# Altium PCB Copy of PCB1.PcbDoc (part 1 of 3)
Units mil, origin at the board's own origin, x right, y up, seen from the top; angles counter-clockwise.
Board outline 2060 x 2060 mil, 4 copper layers (L1, L2, L3, L4), stack 61.583 mil thick; 50 components, 94 nets, 313 pads, 31 vias.
Unrouted connection lines stored in the file: 190.
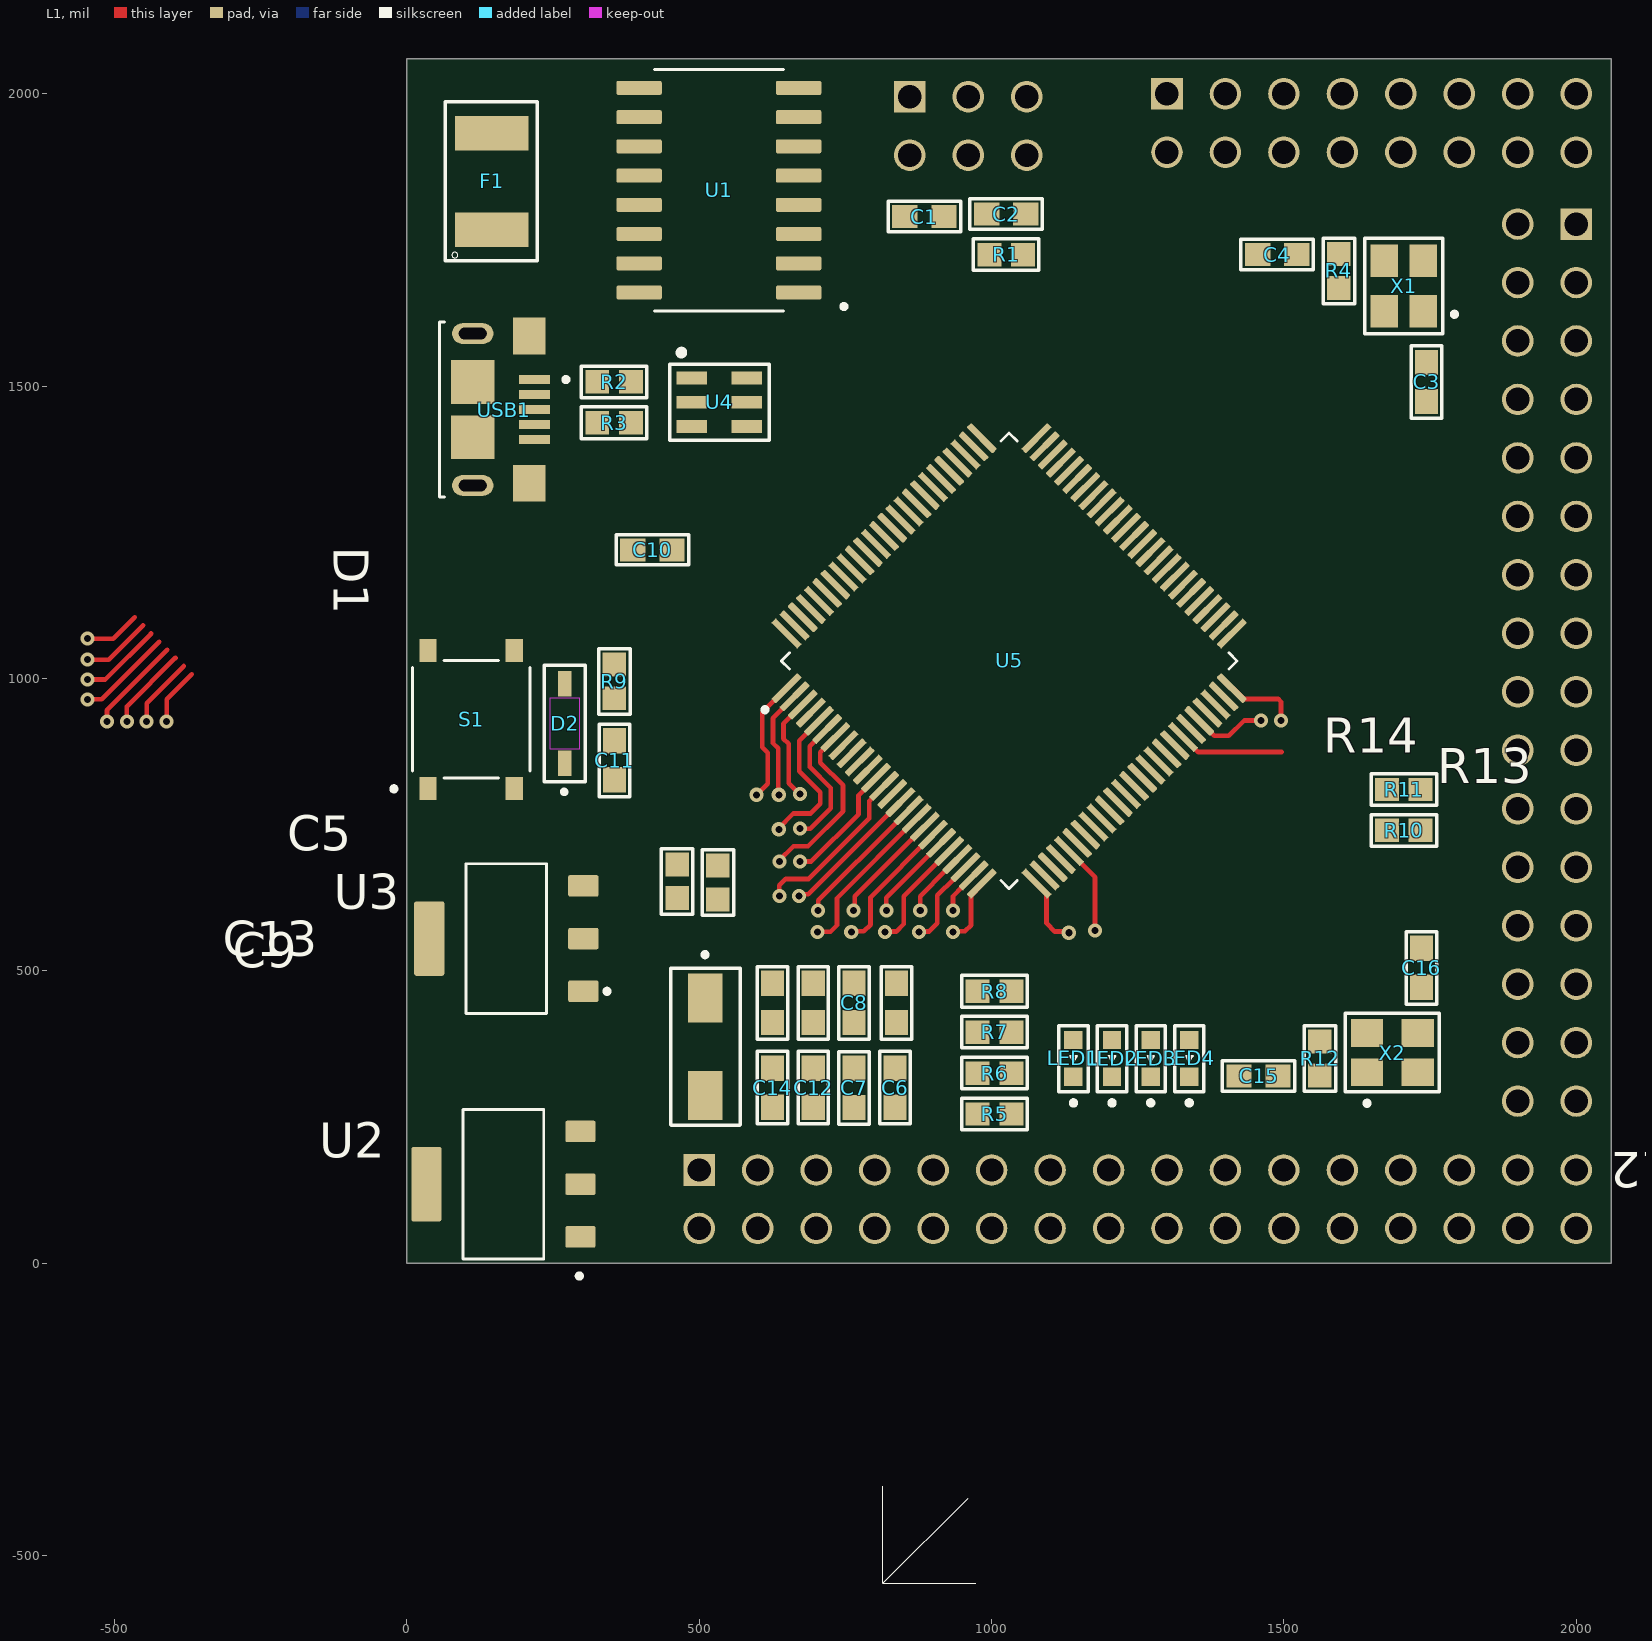
[diagram p0: L1 view]
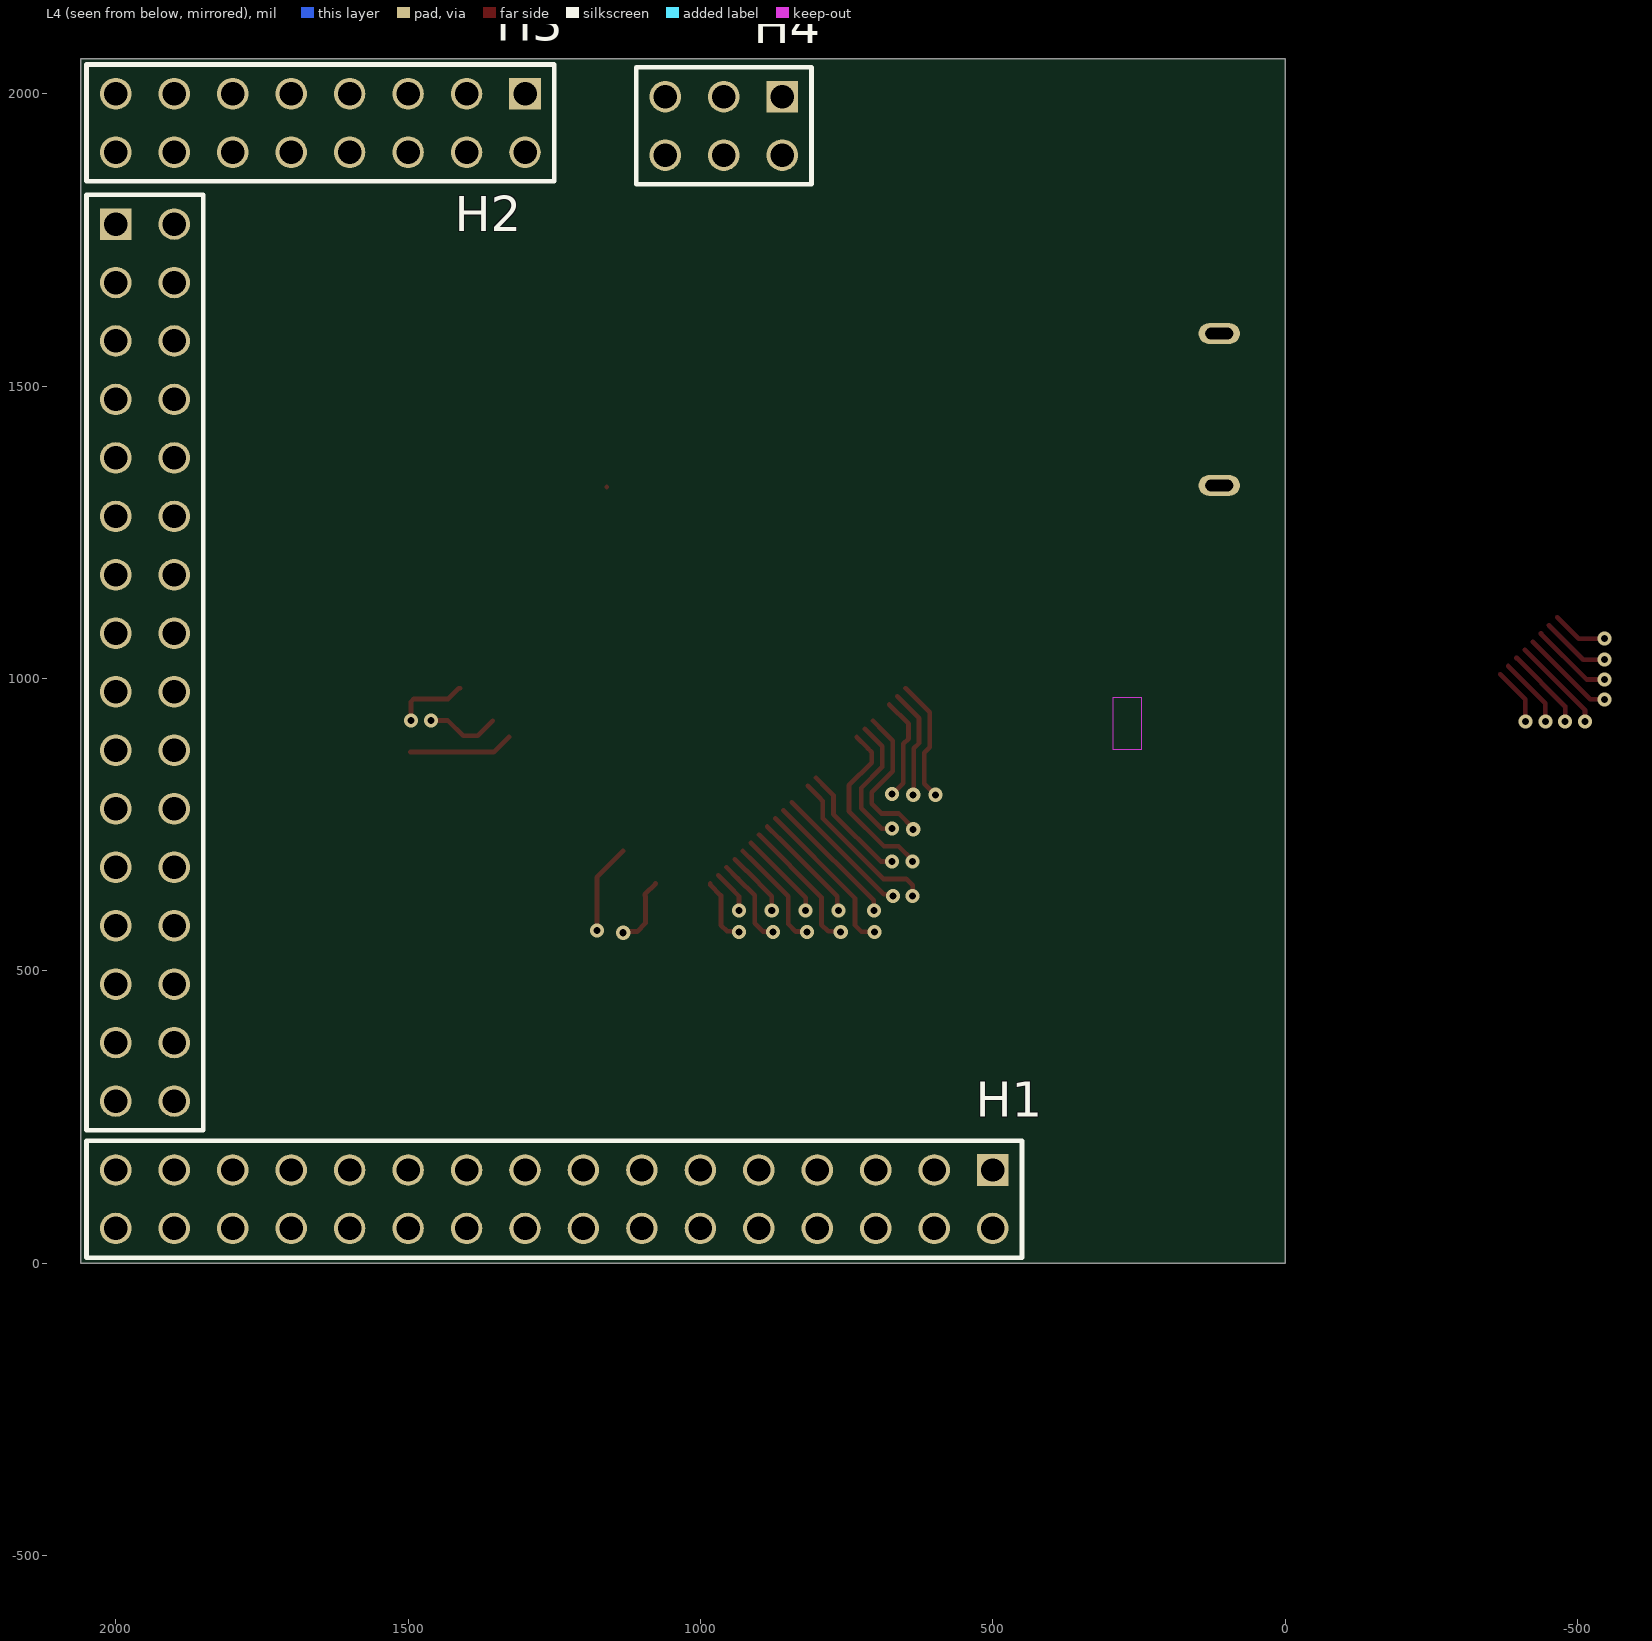
[diagram p1: L4 view, seen from below]
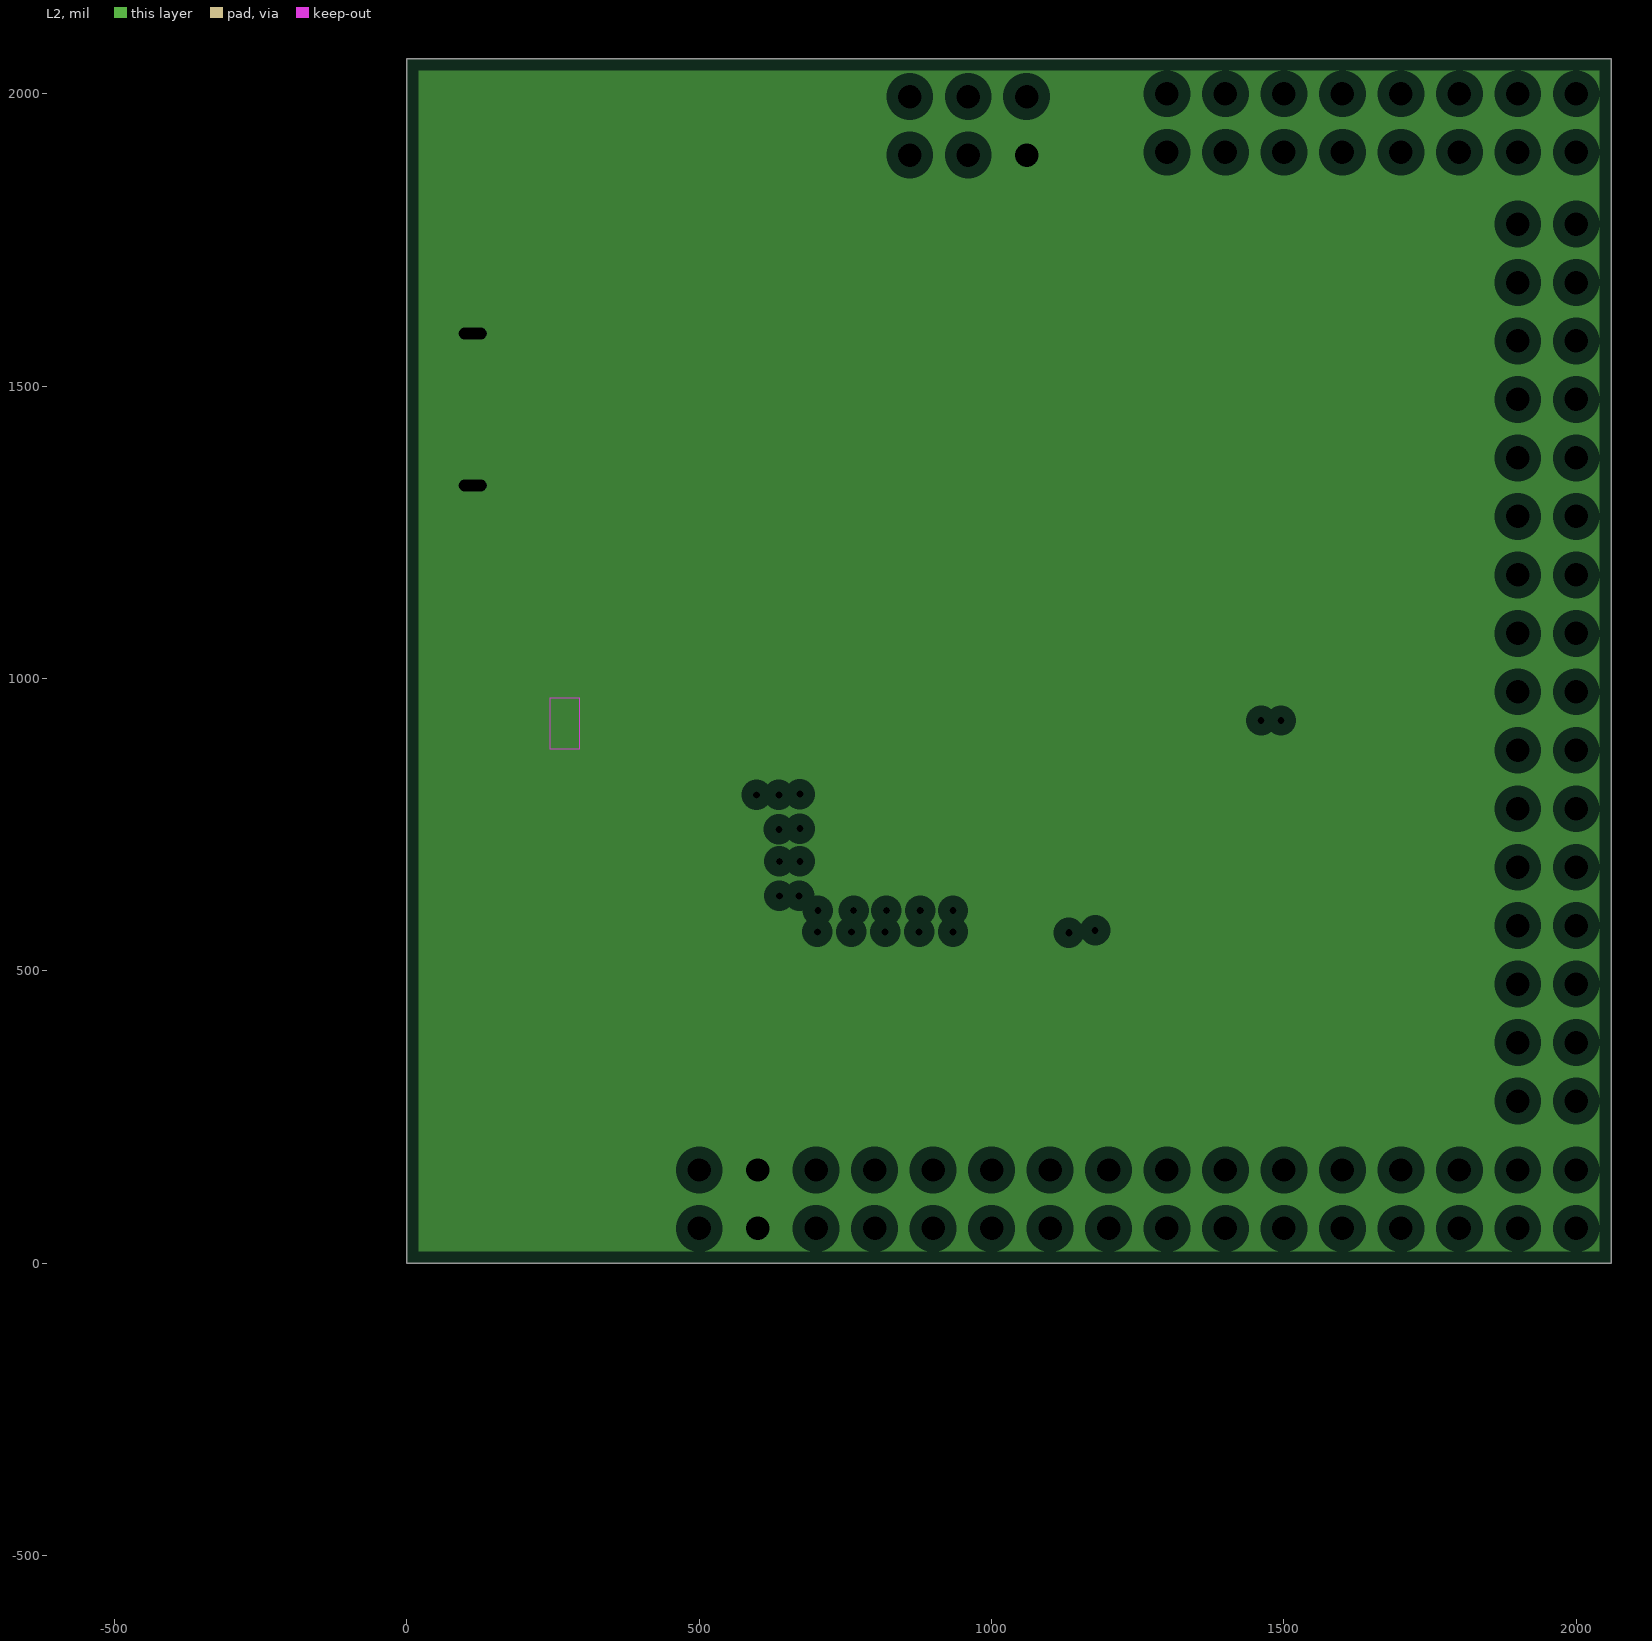
[diagram p2: L2, clearances drawn from the general rule]

## Layer stack, top to bottom
Top Solder: solder mask 0.4, Solder Resist, Dk 3.5
L1: signal copper 1.378
Dielectric 2: prepreg 3.9134, PP-006, Dk 4.1
L2: plane copper 0.5984, net GND
Dielectric 1: dielectric 49.8031, FR-4, Dk 4.8
L3: signal copper 0.5984
Dielectric 3: prepreg 3.9134, PP-006, Dk 4.1
L4: signal copper 1.378
Bottom Solder: solder mask 0.4, Solder Resist, Dk 3.5

## Board outline
0,0 2060,0 2060,2060 0,2060

## Design rules (kind name [scope] priority, off if disabled: settings)
Clearance Smaller [WithinRoom('AtmegaRoom')] p1: gap=6 ignorepadtopadclearanceinfootprint=FALSE
Clearance [All] p2: gap=10 ignorepadtopadclearanceinfootprint=FALSE except(6: SMDPad-SMDPad)
DiffPairsRouting [All] p1: maxlimit=10 minlimit=10 mostfreqgap=10 toplayer_minwidth=15 toplayer_maxwidth=15 toplayer_prefwidth=15 midlayer1_minwidth=15 midlayer1_maxwidth=15 midlayer1_prefwidth=15 bottomlayer_minwidth=15 bottomlayer_maxwidth=15 bottomlayer_prefwidth=15 maxuncoupledlength=500
PlaneClearance [All] p1: clearance=20
PlaneConnect [All] p1: planeconnectstyle=Direct reliefexpansion=20 reliefentries=4 reliefconductorwidth=10 reliefairgap=10
PolygonConnect [All] p1: connectstyle=Relief reliefconductorwidth=10 reliefentries=4 polygonreliefangle="90 Angle" airgapwidth=10
RoutingVias [All] p1: holewidth=12 width=24 viastyle="Through Hole" minholewidth=12 minwidth=24 maxholewidth=12 maxwidth=24
SolderMaskExpansion [All] p1: expansion=2 istentingtop=FALSE
SupplyNets "Schematic Supply Nets_3" [InNet('3.3V')] p1: voltage=0.000
SupplyNets "Schematic Supply Nets_2" [InNet('VIN')] p2: voltage=0.000
SupplyNets "Schematic Supply Nets_1" [InNet('GND')] p3: voltage=0.000
SupplyNets "Schematic Supply Nets" [InNet('+5V')] p4: voltage=0.000
Width [All] p1: maxlimit=100 minlimit=8 preferedwidth=10 midlayer1_maxwidth=10 minimp=50.000000 maximp=50.000000 favimp=50.000000
27 further rules are at their usual default settings.

## Classes and differential pairs
differential pair class Diff90: USB
differential pair USB: +USB_P -USB_N

## Components (designator, comment, footprint, x,y, rotation, side; value= is the part's Value field where it differs from the comment)
C1 "100nF" "CAPC1608X90 - 100NF" 885,1790 r180 top
C2 "100nF" "CAPC1608X90 - 100NF" 1025,1794.01 r0 top
C3 "22pF" "CAPC1608X90 - 22PF" 1744,1507 r90 top
C4 "22pF" "CAPC1608X90 - 22PF" 1488.54,1725 r0 top
C5 "10uF" "CAPC1608X90 - 10UF" 625,445 r90 top value=10µF
C6 "10uF" "CAPC1608X90 - 10UF" 835,300 r270 top value=10µF
C7 "100nF" "CAPC1608X90 - 100NF" 764.88,299.71 r270 top
C8 "10uF" "CAPC1608X90 - 10UF" 765,445 r90 top value=10µF
C9 "100nF" "CAPC1608X90 - 100NF" 695,445 r90 top
C10 "100nF" "CAPC1608X90 - 100NF" 420,1220 r180 top
C11 "100nF" "CAPC1608X90 - 100NF" 355,860 r90 top
C12 "100nF" "CAPC1608X90 - 100NF" 695,300 r270 top
C13 "100nF" "CAPC1608X90 - 100NF" 837.04,445 r90 top
C14 "100nF" "CAPC1608X90 - 100NF" 625,300 r270 top
C15 "22pF" "CAPC1608X90 - 22PF" 1456.54,320 r0 top
C16 "22pF" "CAPC1608X90 - 22PF" 1735,505 r270 top
D1 "SS14" DIOM4325X250N 510,370 r270 top
D2 "1N4148W" SOD123_DIO 270,922.91 r90 top
F1 "500mA PTC" FUSM4632X85 145,1850 r90 top value=150mΩ
H1 "Header Through Hole 32 position" SAMTEC_TSW-116-07-G-D 1250,109.23 r0 bottom
H2 "Header Through Hole 32 position" SAMTEC_TSW-116-07-G-D 1950,1027.12 r270 bottom
H3 "Header Through Hole 16 position" SAMTEC_TSW-108-07-G-D 1650,1950 r0 bottom
H4 "Header Through Hole 6 position" SAMTEC_TSW-103-07-G-D 960,1945 r0 bottom
LED1 "Green Led" WL-SMCW_0603-G 1140,350 r90 top
LED2 "Yellow Led" WL-SMCW_0603-Y 1206.01,350 r90 top
LED3 "Red Led" WL-SMCW_0603-R 1272.02,350 r90 top
LED4 "Blue Led" WL-SMCW_0603-B 1338.03,350 r90 top
R1 "10k" "RESC1607X60N - 10K" 1025,1725 r0 top value=10kΩ
R2 "22" "RESC1607X60N - 22" 354.48,1507.3 r0 top value=22Ω
R3 "22" "RESC1607X60N - 22" 354.48,1437.29 r0 top value=22Ω
R4 "1M" "RESC1607X60N - 1M" 1594,1697 r270 top value=1mF
R5 "1k" "RESC1607X60N - 1K" 1005,255 r0 top value=1kΩ
R6 "1k" "RESC1607X60N - 1K" 1005,325 r0 top value=1kΩ
R7 "1k" "RESC1607X60N - 1K" 1005,395 r0 top value=1kΩ
R8 "1k" "RESC1607X60N - 1K" 1005,465 r0 top value=1kΩ
R9 "10k" "RESC1607X60N - 10K" 355,995 r90 top value=10kΩ
R10 "10k" "RESC1607X60N - 10K" 1705,739.99 r0 top value=10kΩ
R11 "10k" "RESC1607X60N - 10K" 1705,810 r0 top value=10kΩ
R12 "1M" "RESC1607X60N - 1M" 1561.55,350 r270 top value=1mF
R13 "1k" "RESC1607X60N - 1K" 532,651 r90 top value=1kΩ
R14 "1k" "RESC1607X60N - 1K" 461.99,653 r90 top value=1kΩ
S1 "SW" SW_TS-1187A-B-A-B 110,930 r90 top
U1 "CH340G" SOP127P780X200-16N 533.58,1835 r180 top
U2 "AMS1117-5.0" SOT229P700X180-4N-5.0 165,135 r90 top
U3 "AMS1117-3.3" SOT229P700X180-4N-3.3 170,555 r90 top
U4 "SRV05-4" TSOP6_3P1X1P7_ONS 534.48,1472.29 r0 top
U5 "ATMEGA2560-16AU" QFP50P1600X1600X120-100N 1030,1030 r45 top locked
USB1 "Micro-USB-B" AMPHENOL_10118193-0001LF 112.6,1459.92 r270 top
X1 "12MHz" OSCCC250X320X70-4N 1710,1661.13 r180 top
X2 "16MHZ" XTAL_7M-16.000MAAJ-T 1685.56,359.99 r90 top

## Footprints (in the part's own frame and the unit in brackets; to place one, negate y for a bottom-side part, rotate by r counter-clockwise, add the part's x,y. Pads: shape width x height; smd on the part's side, far side on the other; paste and mask are expansions set on the pad)
AMPHENOL_10118193-0001LF [mm]
  rect 0.4x1.35 smd: 1(-1.3,2.675) 2(-0.65,2.675) 3(0,2.675) 4(0.65,2.675) 5(1.3,2.675)
  rect 1.6x1.4 smd: S1(-3.2,2.45) S2(3.2,2.45)
  rect 1.9x1.9 smd: S3(1.2,0) S4(-1.2,0)
  oval 0.9x1.8 hole 0.5 slot 1.2 at 90 deg: S5(-3.3,0) S6(3.3,0)
  silkscreen extent -3.8,-1.45 3.8,4.15, body extent -3.93,-2.76 3.93,2.95, height 2.85
"CAPC1608X90 - 10UF" [mm]
  rect 1.1x1 smd: 1(-0.85,0) 2(0.85,0)
  silkscreen extent -1.57,-0.66 1.57,0.66, body extent -0.81,-0.44 0.79,0.46, height 0.81
"CAPC1608X90 - 22PF" [mm]
  rect 1.1x1 smd: 1(-0.85,0) 2(0.85,0)
  silkscreen extent -1.57,-0.66 1.57,0.66, body extent -0.8,-0.44 0.8,0.46, height 0.81
"CAPC1608X90 - 100NF" [mm]
  rect 1.1x1 smd: 1(-0.85,0) 2(0.85,0)
  silkscreen extent -1.57,-0.66 1.57,0.66, body extent -0.8,-0.4 0.8,0.4, height 0.9
DIOM4325X250N [mm]
  rect 2.12x1.5 smd paste+0 mask+0.102: A(2.115,0) C(-2.115,0)
  silkscreen extent -4.1,-1.5 3.4,1.52, body extent -2.57,-1.25 2.57,1.31, height 2.5
FUSM4632X85 [mm]
  rect 1.5x3.2 smd: 1(-2.1,0) 2(2.1,0)
  silkscreen extent -3.45,-1.98 3.45,2.01, body extent -2.27,-1.62 2.27,1.62, height 1.11
OSCCC250X320X70-4N [mm]
  rect 1.2x1.4 smd: 1(-0.723,0.846) 2(-0.723,-1.354) 3(0.977,-1.354) 4(0.977,0.846)
  silkscreen extent -2.17,-2.34 1.83,1.83, body extent -1.12,-1.85 1.38,1.35, height 0.8
QFP50P1600X1600X120-100N [mm]
  rrect25% 1.6x0.28 smd: 1(-7.68,6) 2(-7.68,5.5) 3(-7.68,5) 4(-7.68,4.5) 5(-7.68,4) 6(-7.68,3.5) 7(-7.68,3) 8(-7.68,2.5) 9(-7.68,2) 10(-7.68,1.5) 11(-7.68,1) 12(-7.68,0.5) 13(-7.68,0) 14(-7.68,-0.5) 15(-7.68,-1) 16(-7.68,-1.5) 17(-7.68,-2) 18(-7.68,-2.5) 19(-7.68,-3) 20(-7.68,-3.5) 21(-7.68,-4) 22(-7.68,-4.5) 23(-7.68,-5) 24(-7.68,-5.5) 25(-7.68,-6) 51(7.68,-6) 52(7.68,-5.5) 53(7.68,-5) 54(7.68,-4.5) 55(7.68,-4) 56(7.68,-3.5) 57(7.68,-3) 58(7.68,-2.5) 59(7.68,-2) 60(7.68,-1.5) 61(7.68,-1) 62(7.68,-0.5) 63(7.68,0) 64(7.68,0.5) 65(7.68,1) 66(7.68,1.5) 67(7.68,2) 68(7.68,2.5) 69(7.68,3) 70(7.68,3.5) 71(7.68,4) 72(7.68,4.5) 73(7.68,5) 74(7.68,5.5) 75(7.68,6)
  rrect25% 0.28x1.6 smd: 26(-6,-7.68) 27(-5.5,-7.68) 28(-5,-7.68) 29(-4.5,-7.68) 30(-4,-7.68) 31(-3.5,-7.68) 32(-3,-7.68) 33(-2.5,-7.68) 34(-2,-7.68) 35(-1.5,-7.68) 36(-1,-7.68) 37(-0.5,-7.68) 38(0,-7.68) 39(0.5,-7.68) 40(1,-7.68) 41(1.5,-7.68) 42(2,-7.68) 43(2.5,-7.68) 44(3,-7.68) 45(3.5,-7.68) 46(4,-7.68) 47(4.5,-7.68) 48(5,-7.68) 49(5.5,-7.68) 50(6,-7.68) 76(6,7.68) 77(5.5,7.68) 78(5,7.68) 79(4.5,7.68) 80(4,7.68) 81(3.5,7.68) 82(3,7.68) 83(2.5,7.68) 84(2,7.68) 85(1.5,7.68) 86(1,7.68) 87(0.5,7.68) 88(0,7.68) 89(-0.5,7.68) 90(-1,7.68) 91(-1.5,7.68) 92(-2,7.68) 93(-2.5,7.68) 94(-3,7.68) 95(-3.5,7.68) 96(-4,7.68) 97(-4.5,7.68) 98(-5,7.68) 99(-5.5,7.68) 100(-6,7.68)
  silkscreen extent -9.1,-7 7,7, body extent -8,-8 8,8, height 1.06
"RESC1607X60N - 1K" [mm]
  rect 1.04x1.02 smd: 1(-0.735,0) 2(0.735,0)
  silkscreen extent -1.42,-0.69 1.42,0.69, body extent -0.8,-0.4 0.8,0.4, height 0.55
"RESC1607X60N - 1M" [mm]
  rect 1.04x1.02 smd: 1(-0.735,0) 2(0.735,0)
  silkscreen extent -1.42,-0.69 1.42,0.69, body extent -0.8,-0.4 0.8,0.4, height 0.55
"RESC1607X60N - 10K" [mm]
  rect 1.04x1.02 smd: 1(-0.735,0) 2(0.735,0)
  silkscreen extent -1.42,-0.69 1.42,0.69, body extent -0.8,-0.37 0.8,0.43, height 0.55
"RESC1607X60N - 22" [mm]
  rect 1.04x1.02 smd: 1(-0.735,0) 2(0.735,0)
  silkscreen extent -1.42,-0.69 1.42,0.69, body extent -0.8,-0.4 0.8,0.4, height 0.55
SAMTEC_TSW-103-07-G-D [mm]
  rect 1.37x1.37 / inner round 1.37 / far side rect 1.37x1.37 hole 1.02: 01(-2.54,-1.27)
  round 1.37 hole 1.02: 02(-2.54,1.27) 03(0,-1.27) 04(0,1.27) 05(2.54,-1.27) 06(2.54,1.27)
  silkscreen extent -3.81,-2.54 3.81,2.54, body extent -3.81,-2.54 3.81,2.54, height 8.38
SAMTEC_TSW-108-07-G-D [mm]
  rect 1.37x1.37 / inner round 1.37 / far side rect 1.37x1.37 hole 1.02: 01(-8.89,-1.27)
  round 1.37 hole 1.02: 02(-8.89,1.27) 03(-6.35,-1.27) 04(-6.35,1.27) 05(-3.81,-1.27) 06(-3.81,1.27) 07(-1.27,-1.27) 08(-1.27,1.27) 09(1.27,-1.27) 10(1.27,1.27) 11(3.81,-1.27) 12(3.81,1.27) 13(6.35,-1.27) 14(6.35,1.27) 15(8.89,-1.27) 16(8.89,1.27)
  silkscreen extent -10.16,-2.54 10.16,2.54, body extent -10.24,-2.59 10.08,2.49, height 8.38
SAMTEC_TSW-116-07-G-D [mm]
  rect 1.37x1.37 hole 1.02: 01(-19.05,-1.27)
  round 1.37 hole 1.02: 02(-19.05,1.27) 03(-16.51,-1.27) 04(-16.51,1.27) 05(-13.97,-1.27) 06(-13.97,1.27) 07(-11.43,-1.27) 08(-11.43,1.27) 09(-8.89,-1.27) 10(-8.89,1.27) 11(-6.35,-1.27) 12(-6.35,1.27) 13(-3.81,-1.27) 14(-3.81,1.27) 15(-1.27,-1.27) 16(-1.27,1.27) 17(1.27,-1.27) 18(1.27,1.27) 19(3.81,-1.27) 20(3.81,1.27) 21(6.35,-1.27) 22(6.35,1.27) 23(8.89,-1.27) 24(8.89,1.27) 25(11.43,-1.27) 26(11.43,1.27) 27(13.97,-1.27) 28(13.97,1.27) 29(16.51,-1.27) 30(16.51,1.27) 31(19.05,-1.27) 32(19.05,1.27)
  silkscreen extent -20.32,-2.54 20.32,2.54, body extent -20.32,-2.46 20.32,2.62, height 8.38
SOD123_DIO [mm]
  rect 1.111x0.601 smd paste+0 mask+0: 1(-1.725,0) 2(1.725,0)
  Keep-Out Layer region: -1.119,-0.624 -1.119,0.624 1.119,0.624 1.119,-0.624
  silkscreen extent -3.03,-0.89 2.54,0.89, body extent -1.93,-0.66 1.92,0.69, height 0.81
SOP127P780X200-16N [mm]
  rrect25% 1.97x0.61 smd paste+0 mask+0.102: 1(-3.465,4.445) 2(-3.465,3.175) 3(-3.465,1.905) 4(-3.465,0.635) 5(-3.465,-0.635) 6(-3.465,-1.905) 7(-3.465,-3.175) 8(-3.465,-4.445) 9(3.465,-4.445) 10(3.465,-3.175) 11(3.465,-1.905) 12(3.465,-0.635) 13(3.465,0.635) 14(3.465,1.905) 15(3.465,3.175) 16(3.465,4.445)
  silkscreen extent -5.54,-5.25 2.8,5.25, body extent -3.96,-5.1 3.96,5.1, height 1.8
SOT229P700X180-4N-3.3 [mm]
  rrect15% 0.93x1.31 smd: 1(-2.29,-3.345) 2(0,-3.345) 3(2.29,-3.345)
  rrect15% 3.24x1.31 smd: 2(0,3.345)
  silkscreen extent -3.25,-4.47 3.25,1.75, body extent -3.15,-3.5 3.15,3.5, height 1.8
SOT229P700X180-4N-5.0 [mm]
  rrect15% 0.93x1.31 smd: 1(-2.29,-3.345) 2(0,-3.345) 3(2.29,-3.345)
  rrect15% 3.24x1.31 smd: 4(0,3.345)
  silkscreen extent -4.09,-3.4 3.25,1.75, body extent -3.25,-3.5 3.25,3.5, height 1.8
SW_TS-1187A-B-A-B [mm]
  rect 1x0.75 smd: A(-3,1.875) B(3,1.875) C(-3,-1.875) D(3,-1.875)
  silkscreen extent -3.12,-2.55 2.55,3.46, body extent -3.35,-2.55 3.15,2.55, height 1.55
TSOP6_3P1X1P7_ONS [mil]
  rect 52x22 smd paste+0 mask+0: 1(-47,41.34) 2(-47,0) 3(-47,-41.34) 4(47,-41.34) 5(47,0) 6(47,41.34)
  silkscreen extent -85,-65 85,90, body extent -59,-61 59,61, height 43
WL-SMCW_0603-B [mm]
  rect 0.8x0.8 smd: A(0.8,0) C(-0.8,0)
  silkscreen extent -2.01,-0.64 1.42,0.64, body extent -0.83,-0.4 0.77,0.4, height 0.7
WL-SMCW_0603-G [mm]
  rect 0.8x0.8 smd: A(0.8,0) C(-0.8,0)
  silkscreen extent -2.01,-0.64 1.42,0.64, body extent -0.83,-0.4 0.77,0.4, height 0.7
WL-SMCW_0603-R [mm]
  rect 0.8x0.8 smd: A(0.8,0) C(-0.8,0)
  silkscreen extent -2.01,-0.64 1.42,0.64, body extent -0.83,-0.4 0.77,0.4, height 0.7
WL-SMCW_0603-Y [mm]
  rect 0.8x0.8 smd: A(0.8,0) C(-0.8,0)
  silkscreen extent -2.01,-0.64 1.42,0.64, body extent -0.83,-0.4 0.77,0.4, height 0.7
XTAL_7M-16.000MAAJ-T [mm]
  rect 1.2x1.4 smd: 1(-0.85,1.1) 2(-0.85,-1.1) 3(0.85,-1.1) 4(0.85,1.1)
  silkscreen extent -2.3,-2.03 1.7,2.06, body extent -1.25,-1.6 1.25,1.6, height 0.8

## Part data
C1 C2 C7 C9 C10 C11 C12 C13 C14: library part CC0603KRX7R9BB104, "CAP CER 0.1UF 50V X7R 0603", Case Code (Imperial)=0603, Case Code (Metric)=1608, Dielectric=X7R, Dielectric Material=Ceramic, Manufacturer 1="Yageo Group", Max Operating Temperature=125°C, Min Operating Temperature=-55°C, Supplier Part Number 1=311-1344-6-ND, Tolerance=10%, Voltage=50V, Case/Package=0603, China RoHS=Compliant, ComponentLink1Description=https://datasheet.octopart.com:443/CC0603KRX7R9BB104-Yageo-datasheet-177165144.pdf?src-supplier=IHS, ComponentLink1URL=https://datasheet.octopart.com:443/CC0603KRX7R9BB104-Yageo-datasheet-177165144.pdf?src-supplier=IHS, ComponentLink2Description=https://datasheet.octopart.com:443/CC0603KRX7R9BB104-Yageo-datasheet-82288757.pdf?src-supplier=Upverter, ComponentLink2URL=https://datasheet.octopart.com:443/CC0603KRX7R9BB104-Yageo-datasheet-82288757.pdf?src-supplier=Upverter, ComponentLink3Description=https://datasheet.octopart.com:443/CC0603KRX7R9BB104-Yageo-datasheet-68298032.pdf?src-supplier=Upverter, ComponentLink3URL=https://datasheet.octopart.com:443/CC0603KRX7R9BB104-Yageo-datasheet-68298032.pdf?src-supplier=Upverter, ComponentLink4Description=https://datasheet.octopart.com/CC0603KRX7R9BB104-Yageo-datasheet-10883670.pdf, ComponentLink4URL=https://datasheet.octopart.com/CC0603KRX7R9BB104-Yageo-datasheet-10883670.pdf, ComponentLink5Description=https://datasheet.octopart.com:443/CC0603KRX7R9BB104-Yageo-datasheet-181968726.pdf?src-supplier=Newark, ComponentLink5URL=https://datasheet.octopart.com:443/CC0603KRX7R9BB104-Yageo-datasheet-181968726.pdf?src-supplier=Newark, ComponentLink6Description=https://datasheet.octopart.com:443/CC0603KRX7R9BB104-Yageo-datasheet-499490.pdf?src-supplier=Newark, ComponentLink6URL=https://datasheet.octopart.com:443/CC0603KRX7R9BB104-Yageo-datasheet-499490.pdf?src-supplier=Newark, ComponentLink7Description=https://datasheet.octopart.com:443/CC0603KRX7R9BB104-Yageo-datasheet-62336348.pdf?src-supplier=Newark, ComponentLink7URL=https://datasheet.octopart.com:443/CC0603KRX7R9BB104-Yageo-datasheet-62336348.pdf?src-supplier=Newark, ComponentLink8Description=https://datasheet.octopart.com:443/CC0603KRX7R9BB104-Yageo-datasheet-147453679.pdf?src-supplier=Newark, ComponentLink8URL=https://datasheet.octopart.com:443/CC0603KRX7R9BB104-Yageo-datasheet-147453679.pdf?src-supplier=Newark, ComponentLink9Description=https://datasheet.octopart.com:443/CC0603KRX7R9BB104-Yageo-datasheet-151948686.pdf?src-supplier=Farnell, ComponentLink9URL=https://datasheet.octopart.com:443/CC0603KRX7R9BB104-Yageo-datasheet-151948686.pdf?src-supplier=Farnell, ComponentLink10Description=https://datasheet.octopart.com:443/CC0603KRX7R9BB104-Yageo-datasheet-500777.pdf?src-supplier=Farnell, ComponentLink10URL=https://datasheet.octopart.com:443/CC0603KRX7R9BB104-Yageo-datasheet-500777.pdf?src-supplier=Farnell, ComponentLink11Description=https://datasheet.octopart.com:443/CC0603KRX7R9BB104-Yageo-datasheet-12526321.pdf?src-supplier=Future+Electronics, ComponentLink11URL=https://datasheet.octopart.com:443/CC0603KRX7R9BB104-Yageo-datasheet-12526321.pdf?src-supplier=Future+Electronics, ComponentLink12Description=https://datasheet.octopart.com:443/CC0603KRX7R9BB104-Yageo-Group-datasheet-189192896.pdf?src-supplier=Future+Electronics, ComponentLink12URL=https://datasheet.octopart.com:443/CC0603KRX7R9BB104-Yageo-Group-datasheet-189192896.pdf?src-supplier=Future+Electronics, ComponentLink13Description=https://datasheet.octopart.com:443/CC0603KRX7R9BB104-Yageo-datasheet-166511530.pdf?src-supplier=Future+Electronics, ComponentLink13URL=https://datasheet.octopart.com:443/CC0603KRX7R9BB104-Yageo-datasheet-166511530.pdf?src-supplier=Future+Electronics, ComponentLink14Description=https://datasheet.octopart.com:443/CC0603KRX7R9BB104-Yageo-datasheet-137700082.pdf?src-supplier=Future+Electronics, ComponentLink14URL=https://datasheet.octopart.com:443/CC0603KRX7R9BB104-Yageo-datasheet-137700082.pdf?src-supplier=Future+Electronics, ComponentLink15Description=https://datasheet.octopart.com:443/CC0603KRX7R9BB104-Yageo-datasheet-137700084.pdf?src-supplier=Future+Electronics, ComponentLink15URL=https://datasheet.octopart.com:443/CC0603KRX7R9BB104-Yageo-datasheet-137700084.pdf?src-supplier=Future+Electronics, ComponentLink16Description=https://datasheet.octopart.com:443/CC0603KRX7R9BB104-Yageo-datasheet-27626582.pdf?src-supplier=Future+Electronics, ComponentLink16URL=https://datasheet.octopart.com:443/CC0603KRX7R9BB104-Yageo-datasheet-27626582.pdf?src-supplier=Future+Electronics, ComponentLink17Description=https://datasheet.octopart.com:443/CC0603KRX7R9BB104-Yageo-datasheet-15895757.pdf?src-supplier=Future+Electronics, ComponentLink17URL=https://datasheet.octopart.com:443/CC0603KRX7R9BB104-Yageo-datasheet-15895757.pdf?src-supplier=Future+Electronics, ComponentLink18Description=https://datasheet.octopart.com:443/CC0603KRX7R9BB104-Yageo-datasheet-8324192.pdf?src-supplier=Future+Electronics, ComponentLink18URL=https://datasheet.octopart.com:443/CC0603KRX7R9BB104-Yageo-datasheet-8324192.pdf?src-supplier=Future+Electronics, ComponentLink19Description=https://datasheet.octopart.com:443/CC0603KRX7R9BB104-Yageo-datasheet-178019014.pdf?src-supplier=Burklin+Elektronik, ComponentLink19URL=https://datasheet.octopart.com:443/CC0603KRX7R9BB104-Yageo-datasheet-178019014.pdf?src-supplier=Burklin+Elektronik, ComponentLink20Description=https://datasheet.octopart.com:443/CC0603KRX7R9BB104-Yageo-Group-datasheet-165992755.pdf?src-supplier=ODG+(Origin+Data+Global), ComponentLink20URL=https://datasheet.octopart.com:443/CC0603KRX7R9BB104-Yageo-Group-datasheet-165992755.pdf?src-supplier=ODG+(Origin+Data+Global), ComponentLink21Description=https://datasheet.octopart.com:443/CC0603KRX7R9BB104-Yageo-datasheet-140260305.pdf?src-supplier=SOS+electronic, ComponentLink21URL=https://datasheet.octopart.com:443/CC0603KRX7R9BB104-Yageo-datasheet-140260305.pdf?src-supplier=SOS+electronic, ComponentLink22Description=https://datasheet.octopart.com:443/CC0603KRX7R9BB104-Yageo-datasheet-120101875.pdf?src-supplier=Megastar, ComponentLink22URL=https://datasheet.octopart.com:443/CC0603KRX7R9BB104-Yageo-datasheet-120101875.pdf?src-supplier=Megastar, ComponentLink23Description=https://datasheet.octopart.com:443/CC0603KRX7R9BB104-Yageo-datasheet-8701427.pdf?src-supplier=element14, ComponentLink23URL=https://datasheet.octopart.com:443/CC0603KRX7R9BB104-Yageo-datasheet-8701427.pdf?src-supplier=element14, ComponentLink24Description=https://datasheet.octopart.com:443/CC0603KRX7R9BB104-Yageo-datasheet-5301394.pdf?src-supplier=element14, ComponentLink24URL=https://datasheet.octopart.com:443/CC0603KRX7R9BB104-Yageo-datasheet-5301394.pdf?src-supplier=element14, ComponentLink25Description=https://datasheet.octopart.com:443/CC0603KRX7R9BB104-Yageo-datasheet-17600895.pdf?src-supplier=TME, ComponentLink25URL=https://datasheet.octopart.com:443/CC0603KRX7R9BB104-Yageo-datasheet-17600895.pdf?src-supplier=TME, ComponentLink26Description=http://sigma.octopart.com:80/15889575/rohs_statement/Yageo-CC0603KRX7R9BB104.pdf?src-supplier=Compliance+Statements, ComponentLink26URL=http://sigma.octopart.com:80/15889575/rohs_statement/Yageo-CC0603KRX7R9BB104.pdf?src-supplier=Compliance+Statements, ComponentLink27Description=http://sigma.octopart.com:80/conflict_mineral_statement/Yageo-company-3.pdf?src-supplier=Compliance+Statements, ComponentLink27URL=http://sigma.octopart.com:80/conflict_mineral_statement/Yageo-company-3.pdf?src-supplier=Compliance+Statements, Country of Origin="Mainland China, Taiwan", Depth=800µm, Export Control Classification Number (ECCN) Code=EAR99, Halogen Free="Halogen Free", Harmonized Tariff Schedule (HTS) Code=8532.24.00.20, Height=800µm, Introduction Date=2005-08-18, Lead Free="Lead Free", Length=1.6mm, Lifecycle Status=Production, Manufacturer Part Number 1=CC0603KRX7R9BB104, Material=Ceramic, Mounting Technology="Surface Mount", Number of Terminals=2, Pins=2, Pricing 1="1=0.14, 10=0.08, 50=0.0554, 100=0.0478, 500=0.03526 (USD)", Radiation Hardening=No, REACH SVHC=Unaffected, RoHS=Compliant, Schedule B="8532240020, 8532240020|8532240020, 8532240020|8532240020|8532240020, 8532240020|8532240020|8532240020|8532240020", Stock 1=13983, Supplier 1=DigiKey, Termination=SMD/SMT, Thickness=889µm, Voltage Rating=50V, Voltage Rating (DC)=50V, Width=800µm
C3 C4 C15 C16: library part CC0603JRNPO9BN220, "CAP CER 22PF 50V C0G/NPO 0603", Case Code (Imperial)=0603, Case Code (Metric)=1608, Dielectric=C0G, Dielectric Material=Ceramic, Manufacturer 1="Yageo Group", Max Operating Temperature=125°C, Min Operating Temperature=-55°C, Supplier Part Number 1=311-1062-1-ND, Temperature Coefficient=30ppm/°C, Tolerance=5%, Voltage=50V, Case/Package=0603, China RoHS=Compliant, ComponentLink1Description=https://datasheet.octopart.com:443/CC0603JRNPO9BN220-Yageo-datasheet-182140217.pdf?src-supplier=IHS, ComponentLink1URL=https://datasheet.octopart.com:443/CC0603JRNPO9BN220-Yageo-datasheet-182140217.pdf?src-supplier=IHS, ComponentLink2Description=https://datasheet.octopart.com:443/CC0603JRNPO9BN220-Yageo-datasheet-10406438.pdf?src-supplier=element14+APAC, ComponentLink2URL=https://datasheet.octopart.com:443/CC0603JRNPO9BN220-Yageo-datasheet-10406438.pdf?src-supplier=element14+APAC, ComponentLink3Description=https://datasheet.octopart.com:443/CC0603JRNPO9BN220-Yageo-datasheet-10882999.pdf?src-supplier=element14+APAC, ComponentLink3URL=https://datasheet.octopart.com:443/CC0603JRNPO9BN220-Yageo-datasheet-10882999.pdf?src-supplier=element14+APAC, ComponentLink4Description=https://datasheet.octopart.com:443/CC0603JRNPO9BN220-Yageo-datasheet-78855684.pdf?src-supplier=Upverter, ComponentLink4URL=https://datasheet.octopart.com:443/CC0603JRNPO9BN220-Yageo-datasheet-78855684.pdf?src-supplier=Upverter, ComponentLink5Description=https://datasheet.octopart.com:443/CC0603JRNPO9BN220-Yageo---Phycomp-datasheet-141445762.pdf?src-supplier=Upverter, ComponentLink5URL=https://datasheet.octopart.com:443/CC0603JRNPO9BN220-Yageo---Phycomp-datasheet-141445762.pdf?src-supplier=Upverter, ComponentLink6Description=https://datasheet.octopart.com:443/CC0603JRNPO9BN220-Yageo-Group-datasheet-192360829.pdf?src-supplier=Future+Electronics, ComponentLink6URL=https://datasheet.octopart.com:443/CC0603JRNPO9BN220-Yageo-Group-datasheet-192360829.pdf?src-supplier=Future+Electronics, ComponentLink7Description=https://datasheet.octopart.com:443/CC0603JRNPO9BN220-Yageo-datasheet-12589826.pdf?src-supplier=Future+Electronics, ComponentLink7URL=https://datasheet.octopart.com:443/CC0603JRNPO9BN220-Yageo-datasheet-12589826.pdf?src-supplier=Future+Electronics, ComponentLink8Description=https://datasheet.octopart.com:443/CC0603JRNPO9BN220-Yageo-datasheet-137875056.pdf?src-supplier=Future+Electronics, ComponentLink8URL=https://datasheet.octopart.com:443/CC0603JRNPO9BN220-Yageo-datasheet-137875056.pdf?src-supplier=Future+Electronics, ComponentLink9Description=https://datasheet.octopart.com:443/CC0603JRNPO9BN220-Yageo-datasheet-136957424.pdf?src-supplier=Future+Electronics, ComponentLink9URL=https://datasheet.octopart.com:443/CC0603JRNPO9BN220-Yageo-datasheet-136957424.pdf?src-supplier=Future+Electronics, ComponentLink10Description=https://datasheet.octopart.com:443/CC0603JRNPO9BN220-Yageo-datasheet-137700082.pdf?src-supplier=Future+Electronics, ComponentLink10URL=https://datasheet.octopart.com:443/CC0603JRNPO9BN220-Yageo-datasheet-137700082.pdf?src-supplier=Future+Electronics, ComponentLink11Description=https://datasheet.octopart.com:443/CC0603JRNPO9BN220-Yageo-datasheet-62091628.pdf?src-supplier=Future+Electronics, ComponentLink11URL=https://datasheet.octopart.com:443/CC0603JRNPO9BN220-Yageo-datasheet-62091628.pdf?src-supplier=Future+Electronics, ComponentLink12Description=https://datasheet.octopart.com:443/CC0603JRNPO9BN220-Yageo-datasheet-16730043.pdf?src-supplier=Future+Electronics, ComponentLink12URL=https://datasheet.octopart.com:443/CC0603JRNPO9BN220-Yageo-datasheet-16730043.pdf?src-supplier=Future+Electronics, ComponentLink13Description=https://datasheet.octopart.com:443/CC0603JRNPO9BN220-Yageo-datasheet-15895757.pdf?src-supplier=Future+Electronics, ComponentLink13URL=https://datasheet.octopart.com:443/CC0603JRNPO9BN220-Yageo-datasheet-15895757.pdf?src-supplier=Future+Electronics, ComponentLink14Description=https://datasheet.octopart.com:443/CC0603JRNPO9BN220-Yageo-datasheet-151948684.pdf?src-supplier=Newark, ComponentLink14URL=https://datasheet.octopart.com:443/CC0603JRNPO9BN220-Yageo-datasheet-151948684.pdf?src-supplier=Newark, ComponentLink15Description=https://datasheet.octopart.com:443/CC0603JRNPO9BN220-Phycomp-datasheet-504625.pdf?src-supplier=Newark, ComponentLink15URL=https://datasheet.octopart.com:443/CC0603JRNPO9BN220-Phycomp-datasheet-504625.pdf?src-supplier=Newark, ComponentLink16Description=https://datasheet.octopart.com:443/CC0603JRNPO9BN220-Yageo-datasheet-181968203.pdf?src-supplier=Newark, ComponentLink16URL=https://datasheet.octopart.com:443/CC0603JRNPO9BN220-Yageo-datasheet-181968203.pdf?src-supplier=Newark, ComponentLink17Description=https://datasheet.octopart.com:443/CC0603JRNPO9BN220-Yageo-datasheet-24578986.pdf?src-supplier=Newark, ComponentLink17URL=https://datasheet.octopart.com:443/CC0603JRNPO9BN220-Yageo-datasheet-24578986.pdf?src-supplier=Newark, ComponentLink18Description=https://datasheet.octopart.com:443/CC0603JRNPO9BN220-Yageo-datasheet-67645495.pdf?src-supplier=Newark, ComponentLink18URL=https://datasheet.octopart.com:443/CC0603JRNPO9BN220-Yageo-datasheet-67645495.pdf?src-supplier=Newark, ComponentLink19Description=https://datasheet.octopart.com:443/CC0603JRNPO9BN220-Yageo-datasheet-65873193.pdf?src-supplier=Farnell, ComponentLink19URL=https://datasheet.octopart.com:443/CC0603JRNPO9BN220-Yageo-datasheet-65873193.pdf?src-supplier=Farnell, ComponentLink20Description=https://datasheet.octopart.com:443/CC0603JRNPO9BN220-Yageo-Group-datasheet-188689597.pdf?src-supplier=Farnell, ComponentLink20URL=https://datasheet.octopart.com:443/CC0603JRNPO9BN220-Yageo-Group-datasheet-188689597.pdf?src-supplier=Farnell, ComponentLink21Description=https://datasheet.octopart.com:443/CC0603JRNPO9BN220-Yageo-datasheet-8817079.pdf?src-supplier=element14, ComponentLink21URL=https://datasheet.octopart.com:443/CC0603JRNPO9BN220-Yageo-datasheet-8817079.pdf?src-supplier=element14, ComponentLink22Description=https://datasheet.octopart.com:443/CC0603JRNPO9BN220-Yageo-datasheet-8324240.pdf?src-supplier=element14, ComponentLink22URL=https://datasheet.octopart.com:443/CC0603JRNPO9BN220-Yageo-datasheet-8324240.pdf?src-supplier=element14, ComponentLink23Description=https://datasheet.octopart.com:443/CC0603JRNPO9BN220-Yageo-datasheet-5321569.pdf?src-supplier=element14, ComponentLink23URL=https://datasheet.octopart.com:443/CC0603JRNPO9BN220-Yageo-datasheet-5321569.pdf?src-supplier=element14, ComponentLink24Description=https://datasheet.octopart.com:443/CC0603JRNPO9BN220-Yageo-datasheet-8643175.pdf?src-supplier=SOS+electronic, ComponentLink24URL=https://datasheet.octopart.com:443/CC0603JRNPO9BN220-Yageo-datasheet-8643175.pdf?src-supplier=SOS+electronic, ComponentLink25Description=https://datasheet.octopart.com:443/CC0603JRNPO9BN220-Yageo-datasheet-8555986.pdf?src-supplier=TME, ComponentLink25URL=https://datasheet.octopart.com:443/CC0603JRNPO9BN220-Yageo-datasheet-8555986.pdf?src-supplier=TME, ComponentLink26Description=https://datasheet.octopart.com:443/CC0603JRNPO9BN220-Yageo-datasheet-68296204.pdf?src-supplier=Megastar, ComponentLink26URL=https://datasheet.octopart.com:443/CC0603JRNPO9BN220-Yageo-datasheet-68296204.pdf?src-supplier=Megastar, ComponentLink27Description=http://sigma.octopart.com:80/conflict_mineral_statement/Yageo-company-3.pdf?src-supplier=Compliance+Statements, ComponentLink27URL=http://sigma.octopart.com:80/conflict_mineral_statement/Yageo-company-3.pdf?src-supplier=Compliance+Statements, ComponentLink28Description=http://sigma.octopart.com:80/rohs_statement/Yageo-company-2.pdf?src-supplier=Compliance+Statements, ComponentLink28URL=http://sigma.octopart.com:80/rohs_statement/Yageo-company-2.pdf?src-supplier=Compliance+Statements, Country of Origin="Mainland China, Taiwan", Depth=800µm, Export Control Classification Number (ECCN) Code=EAR99, Halogen Free="Halogen Free", Harmonized Tariff Schedule (HTS) Code=8532.24.00.20, Height=800µm, Introduction Date=2003-08-13, Lead Free="Lead Free", Length=1.6mm, Lifecycle Status=Production, Manufacturer Part Number 1=CC0603JRNPO9BN220, Mounting Technology="Surface Mount", Number of Terminals=2, Pins=2, Pricing 1="1=0.11, 10=0.057, 50=0.039, 100=0.0334, 500=0.02416 (USD)", Radiation Hardening=No, REACH SVHC=Unaffected, RoHS=Compliant, Schedule B="8532240020, 8532240020|8532240020, 8532240020|8532240020|8532240020, 8532240020|8532240020|8532240020|8532240020", Stock 1=876, Supplier 1=DigiKey, Termination=SMD/SMT, Thickness=889µm, Voltage Rating=50V, Voltage Rating (AC)=50V, Voltage Rating (DC)=50V, Width=800µm
C5 C6 C8: library part CC0603MRX5R6BB106, "CAP CER 10UF 10V X5R 0603", Case Code (Imperial)=0603, Case Code (Metric)=1608, Dielectric=X5R, Dielectric Material=Ceramic, Manufacturer="Yageo Group", Max Operating Temperature=85°C, Min Operating Temperature=-55°C, Supplier Part Number=311-1817-1-ND, Tolerance=20%, Voltage Rating=10V, Case/Package=0603, Category="Ceramic Capacitors", China RoHS=Compliant, ComponentLink1Description=https://datasheet.octopart.com:443/CC0603MRX5R6BB106-Yageo-datasheet-170350636.pdf?src-supplier=IHS, ComponentLink1URL=https://datasheet.octopart.com:443/CC0603MRX5R6BB106-Yageo-datasheet-170350636.pdf?src-supplier=IHS, ComponentLink2Description=https://datasheet.octopart.com:443/CC0603MRX5R6BB106-Yageo-datasheet-181968810.pdf?src-supplier=Farnell, ComponentLink2URL=https://datasheet.octopart.com:443/CC0603MRX5R6BB106-Yageo-datasheet-181968810.pdf?src-supplier=Farnell, ComponentLink3Description=https://datasheet.octopart.com:443/CC0603MRX5R6BB106-Yageo-datasheet-181968808.pdf?src-supplier=Farnell, ComponentLink3URL=https://datasheet.octopart.com:443/CC0603MRX5R6BB106-Yageo-datasheet-181968808.pdf?src-supplier=Farnell, ComponentLink4Description=https://datasheet.octopart.com/CC0603MRX5R6BB106-Yageo-datasheet-86397281.pdf, ComponentLink4URL=https://datasheet.octopart.com/CC0603MRX5R6BB106-Yageo-datasheet-86397281.pdf, ComponentLink5Description=https://datasheet.octopart.com:443/CC0603MRX5R6BB106-Yageo-Group-datasheet-184398209.pdf?src-supplier=LCSC, ComponentLink5URL=https://datasheet.octopart.com:443/CC0603MRX5R6BB106-Yageo-Group-datasheet-184398209.pdf?src-supplier=LCSC, ComponentLink6Description=https://datasheet.octopart.com:443/CC0603MRX5R6BB106-Yageo-Group-datasheet-175963154.pdf?src-supplier=Newark, ComponentLink6URL=https://datasheet.octopart.com:443/CC0603MRX5R6BB106-Yageo-Group-datasheet-175963154.pdf?src-supplier=Newark, ComponentLink7Description=https://datasheet.octopart.com:443/CC0603MRX5R6BB106-Yageo-datasheet-158238148.pdf?src-supplier=Newark, ComponentLink7URL=https://datasheet.octopart.com:443/CC0603MRX5R6BB106-Yageo-datasheet-158238148.pdf?src-supplier=Newark, ComponentLink8Description=https://datasheet.octopart.com:443/CC0603MRX5R6BB106-Yageo-Group-datasheet-145016144.pdf?src-supplier=ODG+(Origin+Data+Global), ComponentLink8URL=https://datasheet.octopart.com:443/CC0603MRX5R6BB106-Yageo-Group-datasheet-145016144.pdf?src-supplier=ODG+(Origin+Data+Global), ComponentLink9Description=https://datasheet.octopart.com:443/CC0603MRX5R6BB106-Yageo-datasheet-137700082.pdf?src-supplier=Future+Electronics, ComponentLink9URL=https://datasheet.octopart.com:443/CC0603MRX5R6BB106-Yageo-datasheet-137700082.pdf?src-supplier=Future+Electronics, ComponentLink10Description=https://datasheet.octopart.com:443/CC0603MRX5R6BB106-Yageo-datasheet-78855687.pdf?src-supplier=Future+Electronics, ComponentLink10URL=https://datasheet.octopart.com:443/CC0603MRX5R6BB106-Yageo-datasheet-78855687.pdf?src-supplier=Future+Electronics, ComponentLink11Description=https://datasheet.octopart.com:443/CC0603MRX5R6BB106-Yageo-Group-datasheet-192360830.pdf?src-supplier=Future+Electronics, ComponentLink11URL=https://datasheet.octopart.com:443/CC0603MRX5R6BB106-Yageo-Group-datasheet-192360830.pdf?src-supplier=Future+Electronics, ComponentLink12Description=http://sigma.octopart.com:80/conflict_mineral_statement/Yageo-company-3.pdf?src-supplier=Compliance+Statements, ComponentLink12URL=http://sigma.octopart.com:80/conflict_mineral_statement/Yageo-company-3.pdf?src-supplier=Compliance+Statements, ComponentLink13Description=http://sigma.octopart.com:80/rohs_statement/Yageo-company-2.pdf?src-supplier=Compliance+Statements, ComponentLink13URL=http://sigma.octopart.com:80/rohs_statement/Yageo-company-2.pdf?src-supplier=Compliance+Statements, Composition=Ceramic, Country of Origin="Mainland China, Taiwan", Depth=800µm, Export Control Classification Number (ECCN) Code=EAR99, Halogen Free="Halogen Free", Harmonized Tariff Schedule (HTS) Code=8532.24.00.20, Height=800µm, Introduction Date=2013-02-05, Lead Free="Lead Free", Length=1.6mm, Lifecycle Status=Production, Manufacturer Part Number=CC0603MRX5R6BB106, Mounting Technology="Surface Mount", Number of Terminals=2, Packaging="Tape and Reel", Pricing="1=0.43, 10=0.252, 50=0.1838, 100=0.1629, 500=0.12756 (USD)", REACH SVHC=Unaffected, RoHS=Compliant, Schedule B="8532240020, 8532240020|8532240020|8532240020|8532240020|8532240020|8532240020|8532240020|8532240020|8532240020|8532240020|8532240020|8532240020|8532240020|8532240020|8532240020, 8532240020|8532240020|8532240020|8532240020|8532240020|8532240020|8532240020|8532240020|8532240020|8532240020|8532240020|8532240020|8532240020|8532240020|8532240020|8532240020, 8532240020|8532240020|8532240020|8532240020|8532240020|8532240020|8532240020|8532240020|8532240020|8532240020|8532240020|8532240020|8532240020|8532240020|8532240020|8532240020|8532240020", Stock=2, Supplier=DigiKey, Termination=SMD/SMT, Thickness=889µm, Voltage Rating (DC)=10V, Weight=2.012816mg, Width=800µm
D1: "DIODE SCHOTTKY 40V 1A DO214AC", Case/Package=SMA, Current Rating=1A, Forward Voltage=500mV, Manufacturer="Taiwan Semiconductor", Manufacturer Lifecycle Status=ACTIVE, Max Forward Surge Current (Ifsm)=40A, Max Junction Temperature (Tj)=125°C, Max Repetitive Reverse Voltage (Vrrm)=40V, Max Reverse Leakage Current=200µA, Max Surge Current=30A, Min Operating Temperature=-65°C, Power Dissipation=400mW, Supplier Part Number=1801-SS14CT-ND, Category="Schottky Diodes", China RoHS=Non-Compliant, ComponentLink1Description=https://datasheet.octopart.com:443/SS14-Taiwan-Semiconductor-datasheet-179284502.pdf?src-supplier=IHS, ComponentLink1URL=https://datasheet.octopart.com:443/SS14-Taiwan-Semiconductor-datasheet-179284502.pdf?src-supplier=IHS, ComponentLink2Description=https://datasheet.octopart.com:443/SS14-Taiwan-Semiconductor-datasheet-181551144.pdf?src-supplier=IHS, ComponentLink2URL=https://datasheet.octopart.com:443/SS14-Taiwan-Semiconductor-datasheet-181551144.pdf?src-supplier=IHS, ComponentLink3Description=https://datasheet.octopart.com:443/SS14-Taiwan-Semiconductor-datasheet-180789182.pdf?src-supplier=IHS, ComponentLink3URL=https://datasheet.octopart.com:443/SS14-Taiwan-Semiconductor-datasheet-180789182.pdf?src-supplier=IHS, ComponentLink4Description=https://datasheet.octopart.com:443/SS14-Taiwan-Semiconductor-datasheet-182397600.pdf?src-supplier=IHS, ComponentLink4URL=https://datasheet.octopart.com:443/SS14-Taiwan-Semiconductor-datasheet-182397600.pdf?src-supplier=IHS, ComponentLink5Description=https://datasheet.octopart.com:443/SS14-Taiwan-Semiconductor-datasheet-68472387.pdf?src-supplier=Taiwan+Semiconductor, ComponentLink5URL=https://datasheet.octopart.com:443/SS14-Taiwan-Semiconductor-datasheet-68472387.pdf?src-supplier=Taiwan+Semiconductor, ComponentLink6Description=https://datasheet.octopart.com:443/SS14-Taiwan-Semiconductor-datasheet-34355587.pdf?src-supplier=Taiwan+Semiconductor, ComponentLink6URL=https://datasheet.octopart.com:443/SS14-Taiwan-Semiconductor-datasheet-34355587.pdf?src-supplier=Taiwan+Semiconductor, ComponentLink7Description=https://datasheet.octopart.com:443/SS14-Taiwan-Semiconductor-datasheet-152739498.pdf?src-supplier=Farnell, ComponentLink7URL=https://datasheet.octopart.com:443/SS14-Taiwan-Semiconductor-datasheet-152739498.pdf?src-supplier=Farnell, ComponentLink8Description=https://datasheet.octopart.com:443/SS14-Taiwan-Semiconductor-datasheet-13727340.pdf?src-supplier=Newark, ComponentLink8URL=https://datasheet.octopart.com:443/SS14-Taiwan-Semiconductor-datasheet-13727340.pdf?src-supplier=Newark, ComponentLink9Description=https://datasheet.octopart.com:443/SS14-Taiwan-Semiconductor-datasheet-11549383.pdf?src-supplier=JRH+Electronics, ComponentLink9URL=https://datasheet.octopart.com:443/SS14-Taiwan-Semiconductor-datasheet-11549383.pdf?src-supplier=JRH+Electronics, ComponentLink10Description=https://datasheet.octopart.com:443/SS14-Taiwan-Semiconductor-datasheet-8823.pdf?src-supplier=Mouser, ComponentLink10URL=https://datasheet.octopart.com:443/SS14-Taiwan-Semiconductor-datasheet-8823.pdf?src-supplier=Mouser, Contact Plating=Tin, Country of Origin="Mainland China, Taiwan", Element Configuration=Single, Export Control Classification Number (ECCN) Code=EAR99, Forward Current=1A, Harmonized Tariff Schedule (HTS) Code=8541.10.00.80, Introduction Date=1998-01-20, Lead Free="Lead Free", Lifecycle Status=Production, Manufacturer Part Number=SS14, Max Operating Temperature=125°C, Max Output current=1A, Min Breakdown Voltage=40V, Mounting Technology="Surface Mount", Number of Elements=1, Number of Terminals=2, Output Current=1A, Packaging="Cut Tape", Peak Non-Repetitive Surge Current=30A, Peak Reverse Current=200µA, Pins=2, Polarity=Standard, Pricing="1=0.39, 10=0.236, 50=0.1698, 100=0.148, 500=0.1096 (USD)", REACH SVHC=Affected, Reverse Recovery Time=25ns, Reverse Standoff Voltage=40V, RoHS=Compliant, Schedule B="8541100080, 8541100080|8541100080|8541100080|8541100080|8541100080", Stock=63885, Supplier=DigiKey, Voltage Rating (DC)=40V
D2: "DIODE STANDARD 75V 250MA SOD123", Manufacturer 1="Sangdest Microelectronics", Max Operating Temperature=150°C, Max Output current=150mA, Max Power Dissipation=410mW, Reverse Standoff Voltage=75V, Supplier Part Number 1=1655-1N4148WCT-ND, ComponentLink1Description=https://datasheet.octopart.com:443/1N4148W-SMC-Diode-Solutions-datasheet-181398799.pdf?src-supplier=IHS, ComponentLink1URL=https://datasheet.octopart.com:443/1N4148W-SMC-Diode-Solutions-datasheet-181398799.pdf?src-supplier=IHS, Country of Origin="Mainland China", Export Control Classification Number (ECCN) Code=EAR99, Harmonized Tariff Schedule (HTS) Code=8541.10.00.70, Introduction Date=2003-01-15, Lifecycle Status=Production, Manufacturer Part Number 1=1N4148W, Number of Elements=1, Number of Terminals=2, Pricing 1="1=0.14, 10=0.083, 50=0.0592, 100=0.0512, 500=0.03694 (USD)", REACH SVHC=Unaffected, Reverse Recovery Time=4ns, RoHS=Compliant, Stock 1=266309, Supplier 1=DigiKey
F1: library part MF-MSMF050-2, "PTC RESET FUSE 15V 500MA 1812", Ambient Temperature Range High=85°C, Case Code (Imperial)=1812, Case Code (Metric)=4532, Current Rating=100A, Hold Current=500mA, Manufacturer=Bourns, Min Operating Temperature=-40°C, Operating Supply Voltage=15V, Power Dissipation=800mW, Ratings="AEC-Q200, TUV", Supplier Part Number=MF-MSMF050-2CT-ND, Trip Current=1A, Approvals="CSA, TUV, UL", Case/Package=1812, Category=Fuses, China RoHS=Compliant, ComponentLink1Description=https://datasheet.octopart.com:443/MF-MSMF050-2-Bourns-datasheet-181955250.pdf?src-supplier=IHS, ComponentLink1URL=https://datasheet.octopart.com:443/MF-MSMF050-2-Bourns-datasheet-181955250.pdf?src-supplier=IHS, ComponentLink2Description=https://datasheet.octopart.com:443/MF-MSMF050-2-Bourns-datasheet-134530216.pdf?src-supplier=Electro+Sonic, ComponentLink2URL=https://datasheet.octopart.com:443/MF-MSMF050-2-Bourns-datasheet-134530216.pdf?src-supplier=Electro+Sonic, ComponentLink3Description=https://datasheet.octopart.com:443/MF-MSMF050-2-Bourns-datasheet-192480583.pdf?src-supplier=Electro+Sonic, ComponentLink3URL=https://datasheet.octopart.com:443/MF-MSMF050-2-Bourns-datasheet-192480583.pdf?src-supplier=Electro+Sonic, ComponentLink4Description=https://datasheet.octopart.com:443/MF-MSMF050-2-Bourns-datasheet-10413427.pdf?src-supplier=Electro+Sonic, ComponentLink4URL=https://datasheet.octopart.com:443/MF-MSMF050-2-Bourns-datasheet-10413427.pdf?src-supplier=Electro+Sonic, ComponentLink5Description=https://datasheet.octopart.com:443/MF-MSMF050-2-Bourns-datasheet-68302778.pdf?src-supplier=Electro+Sonic, ComponentLink5URL=https://datasheet.octopart.com:443/MF-MSMF050-2-Bourns-datasheet-68302778.pdf?src-supplier=Electro+Sonic, ComponentLink6Description=https://datasheet.octopart.com:443/MF-MSMF050-2-Bourns-datasheet-28511.pdf?src-supplier=Upverter, ComponentLink6URL=https://datasheet.octopart.com:443/MF-MSMF050-2-Bourns-datasheet-28511.pdf?src-supplier=Upverter, ComponentLink7Description=https://datasheet.octopart.com:443/MF-MSMF050-2-Bourns-datasheet-21630810.pdf?src-supplier=element14+APAC, ComponentLink7URL=https://datasheet.octopart.com:443/MF-MSMF050-2-Bourns-datasheet-21630810.pdf?src-supplier=element14+APAC, ComponentLink8Description=https://datasheet.octopart.com:443/MF-MSMF050-2-Bourns-datasheet-81453701.pdf?src-supplier=element14+APAC, ComponentLink8URL=https://datasheet.octopart.com:443/MF-MSMF050-2-Bourns-datasheet-81453701.pdf?src-supplier=element14+APAC, ComponentLink9Description=https://datasheet.octopart.com:443/MF-MSMF050-2-Bourns-datasheet-14703700.pdf?src-supplier=element14+APAC, ComponentLink9URL=https://datasheet.octopart.com:443/MF-MSMF050-2-Bourns-datasheet-14703700.pdf?src-supplier=element14+APAC, ComponentLink10Description=https://datasheet.octopart.com:443/MF-MSMF050-2-Bourns-datasheet-62100945.pdf?src-supplier=element14+APAC, ComponentLink10URL=https://datasheet.octopart.com:443/MF-MSMF050-2-Bourns-datasheet-62100945.pdf?src-supplier=element14+APAC, ComponentLink11Description=https://datasheet.octopart.com:443/MF-MSMF050-2..-Bourns-datasheet-66614317.pdf?src-supplier=element14+APAC, ComponentLink11URL=https://datasheet.octopart.com:443/MF-MSMF050-2..-Bourns-datasheet-66614317.pdf?src-supplier=element14+APAC, ComponentLink12Description=https://datasheet.octopart.com:443/MF-MSMF050-2-Bourns-datasheet-8700572.pdf?src-supplier=Factory+Futures, ComponentLink12URL=https://datasheet.octopart.com:443/MF-MSMF050-2-Bourns-datasheet-8700572.pdf?src-supplier=Factory+Futures, ComponentLink13Description=https://datasheet.octopart.com:443/MF-MSMF050-2-Bourns-datasheet-8482680.pdf?src-supplier=Factory+Futures, ComponentLink13URL=https://datasheet.octopart.com:443/MF-MSMF050-2-Bourns-datasheet-8482680.pdf?src-supplier=Factory+Futures, ComponentLink14Description=https://datasheet.octopart.com:443/MF-MSMF050-2-Bourns-datasheet-182689041.pdf?src-supplier=JRH+Electronics, ComponentLink14URL=https://datasheet.octopart.com:443/MF-MSMF050-2-Bourns-datasheet-182689041.pdf?src-supplier=JRH+Electronics, ComponentLink15Description=https://datasheet.octopart.com:443/MF-MSMF050-2-Bourns-datasheet-16807568.pdf?src-supplier=Farnell, ComponentLink15URL=https://datasheet.octopart.com:443/MF-MSMF050-2-Bourns-datasheet-16807568.pdf?src-supplier=Farnell, ComponentLink16Description=https://datasheet.octopart.com:443/MF-MSMF050-2-Bourns-datasheet-9622583.pdf?src-supplier=RS+(Formerly+Allied+Electronics), ComponentLink16URL=https://datasheet.octopart.com:443/MF-MSMF050-2-Bourns-datasheet-9622583.pdf?src-supplier=RS+(Formerly+Allied+Electronics), ComponentLink17Description=https://datasheet.octopart.com:443/MF-MSMF050-2-Bourns-datasheet-28695.pdf?src-supplier=RS+(Formerly+Allied+Electronics), ComponentLink17URL=https://datasheet.octopart.com:443/MF-MSMF050-2-Bourns-datasheet-28695.pdf?src-supplier=RS+(Formerly+Allied+Electronics), ComponentLink18Description=https://datasheet.octopart.com:443/MF-MSMF050-2-Bourns-datasheet-10424058.pdf?src-supplier=Jameco+(USA), ComponentLink18URL=https://datasheet.octopart.com:443/MF-MSMF050-2-Bourns-datasheet-10424058.pdf?src-supplier=Jameco+(USA), ComponentLink19Description=https://datasheet.octopart.com:443/MF-MSMF050-2-Bourns-datasheet-15141.pdf?src-supplier=Mouser, ComponentLink19URL=https://datasheet.octopart.com:443/MF-MSMF050-2-Bourns-datasheet-15141.pdf?src-supplier=Mouser, ComponentLink20Description=http://sigma.octopart.com:80/15889809/rohs_statement/Bourns-MF-MSMF050-2.pdf?src-supplier=Compliance+Statements, ComponentLink20URL=http://sigma.octopart.com:80/15889809/rohs_statement/Bourns-MF-MSMF050-2.pdf?src-supplier=Compliance+Statements, ComponentLink21Description=http://sigma.octopart.com:80/conflict_mineral_statement/Bourns-company-36.pdf?src-supplier=Compliance+Statements, ComponentLink21URL=http://sigma.octopart.com:80/conflict_mineral_statement/Bourns-company-36.pdf?src-supplier=Compliance+Statements, Contact Plating=Gold, Export Control Classification Number (ECCN) Code=EAR99, Harmonized Tariff Schedule (HTS) Code=8533.40.80.70, Height=850µm, Introduction Date=2003-09-09, Lead Free="Lead Free", Length=4.73mm, Lifecycle Status=Production, Manufacturer Part Number=MF-MSMF050-2, Max Current Rating=100A, Max Operating Temperature=85°C, Mounting Technology="Surface Mount", Number of Terminals=2, Pins=2, Pricing="1=0.38, 5=0.314, 10=0.29, 50=0.2402, 100=0.2216, 250=0.19928, 500=0.18382, 1000=0.16954 (USD)", Radiation Hardening=No, REACH SVHC=Unaffected, RoHS=Compliant, Schedule B="8536100040, 8536100040|8536100040, 8536100040|8536100040|8536100040, 8536100040|8536100040|8536100040|8536100040", Stock=72264, Supplier=DigiKey, Terminal Material=Gold, Termination=SMD/SMT, Time to Trip=150ms, Voltage Rating=15V, Voltage Rating (DC)=15V, Width=3.41mm, Working Voltage=15V